# EAGLE board si4461 (EAGLE 4.16)
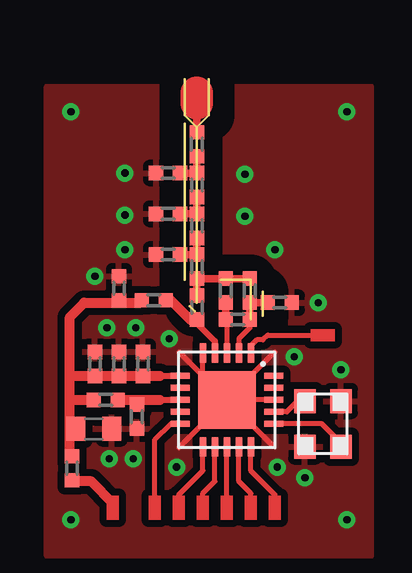
[diagram p0: board, top side]

Size 3.25 x 10 mm. Coordinates in mm from the lower left corner, seen from the top.
Outline: 0,10 0,8.5 0.5,8
Outline: 0.5,8 0.5,0.7
Outline: 0.4,0.35 0.2,0.55
Outline: 1,10 1,8.5 0.5,8
Outline: 1.5,1.65 2.75,1.65 2.75,0
Outline: 0,8.15 0,1.65
Outline: 3.25,1.15 3.25,0.15
Copper layers (1*16): Top 0.035mm / dielectric 1.5mm / Bottom 0.035mm
Design rules "default": minimum track width 10mil, minimum drill 24mil, track to track 8mil, track to pad 8mil, pad to pad 8mil, via to via 8mil, smd to smd 8mil, copper to edge 40mil, drill to drill 8mil, minimum pad ring 10mil, minimum via ring 8mil, stop-mask expansion 4mil, vias tented up to drill 0mil, thermal gap 10mil

## Footprints (pad centres in the part's own frame; a part is rotated, then mirrored left to right if it is on the bottom)
QFN20 = smd 0.8 x 0.26: 1 -1.95,1; 2 -1.95,0.5; 3 -1.95,0; 4 -1.95,-0.5; 5 -1.95,-1; 11 1.95,-1; 12 1.95,-0.5; 13 1.95,0; 14 1.95,0.5; 15 1.95,1 | smd 0.26 x 0.8: 6 -1,-1.95; 7 -0.5,-1.95; 8 0,-1.95; 9 0.5,-1.95; 10 1,-1.95; 16 1,1.95; 17 0.5,1.95; 18 0,1.95; 19 -0.5,1.95; 20 -1,1.95 | smd 2.4 x 2.4: EP 0,0
ABM10 = smd 1 x 0.9: P$1 -0.95,0.75; P$2 0.95,0.75; P$3 0.95,-0.75; P$4 -0.95,-0.75
C0402N = smd 0.6 x 0.6: 1 0.5,0; 2 -0.5,0
C0603N = smd 0.8 x 1: 1 -0.75,0; 2 0.75,0

## Placement (x,y rotation side)
E$1  [QFN20]  1.75,-3.35 270 top
E$2  [ABM10]  5.75,-4.35 90 top  (outside the outline)
E$3  [C0402N]  0.5,0.5 270 top
E$4  [C0402N]  -1.3,0.8 180 top
E$5  [C0402N]  -2.75,1.3 270 top
E$6  [C0402N]  -1.75,-1.85 270 top
E$7  [C0402N]  -2.75,-1.85 270 top
E$8  [C0402N]  -3.75,-1.85 270 top  (outside the outline)
E$9  [C0603N]  -3.8,-4.55 180 top  (outside the outline)
E$10  [C0402N]  -3.3,-3.35 0 top  (outside the outline)
E$11  [C0402N]  -2,-4.05 90 top  (outside the outline)
E$12  [C0402N]  0.5,2.2 270 top
E$13  [C0402N]  -0.7,2.7 0 top
E$14  [C0402N]  0.5,3.9 270 top
E$15  [C0402N]  -0.7,4.4 0 top
E$16  [C0402N]  0.5,5.6 270 top
E$17  [C0402N]  -0.7,6.1 0 top
E$18  [C0402N]  -4.7,-6.2 90 top  (outside the outline)
E$19  [C0402N]  3.95,0.7 0 top
E$20  [C0402N]  2.2,0 180 top
E$21  [C0402N]  1.7,1.2 270 top
E$22  [C0402N]  2.7,1.2 270 top
E$23  [C0402N]  0.5,7.3 90 top

## Library data of the parts
E$1 = texas
E$2 = crystal
E$3-E$23 = ref-packages

## Nets
GND: E$2.P$1 E$2.P$3 E$5.2 E$6.2 E$7.2 E$8.2 E$9.1 E$11.2 E$13.2 E$15.2 E$17.2 E$19.1
S$4: E$3.1 E$4.2
S$5: E$10.1
S$7: E$10.2
S$14: E$3.2
S$20: E$12.1

## Tracks (layer width: path | path; a pad name or v marks a point on that pad's centre or on a via)
GND  (via drill 0.3)
  Top 0.2: 1.75,-3.35 0.75,-2.35 | 0.75,-2.35 -0.25,-1.35 | 1.75,-3.35 3.75,-1.35 | 1.75,-3.35 3.6,-5.2 | -0.25,-5.35 1.75,-3.35 | 0.75,-2.35 0.75,-1.35
  other vias: -0.65,-0.8 -3.25,-0.35 -0.35,-6.15 3.85,-6.15 -3.75,1.8 -2.5,2.9 -2.5,4.35 -2.5,6.1 -3.15,-5.8 -2.15,-5.8 6.75,8.65 -4.75,8.65 -4.75,-8.35 6.75,-8.35 6.5,-2.1 -2.05,-0.35 2.5,6.05 2.5,4.3 3.75,2.9 5.55,0.7 4.55,-1.55 5,-6.6
  pour Top (isolate 0.305): -5.75,-9.85 -5.75,9.7 7.75,9.7 7.75,-9.85
S$1
  Top 0.2: 3.75,-3.85 4.25,-3.85 4.75,-3.35
S$2
  Top 0.2: 3.75,-4.35 5.7,-4.35 6.7,-5.35
S$3
  Top 0.2: 3.75,-3.35 2.25,-3.35
S$4
  Top 0.254: 1.25,-1.35 1.25,-0.9 0.5,-0.15 E$3.1
  Top 0.305: -0.6,0.8 E$4.2
  Top 0.406: E$3.1 0.2,0 -0.6,0.8
S$5
  Top 0.254: -1.05,-3.35 -0.25,-3.35
  Top 0.406: E$10.1 -1.05,-3.35
S$6
  Top 0.305: -0.35,2.7 0.5,2.7 0.5,3.5
S$7
  Top 0.254: -1.05,-2.35 -0.25,-2.35
  Top 0.406: -4.8,-2.35 -1.05,-2.35 | -4.8,-3.35 -4.8,-2.35 | -4.8,-2.35 -4.8,0.1 -4.2,0.7 -1.85,0.7 | -4.8,-3.35 E$10.2 | -4.8,-5.6 -4.8,-3.35
S$8
  Top 0.2: -0.25,-4.35 -0.6,-4.35 -1.25,-5 -1.25,-7.35
S$9
  Top 0.2: -0.25,-7.35 -0.25,-7.3 0.75,-6.3 0.75,-5.35
S$10
  Top 0.2: 0.75,-7.6 0.75,-7.25 1.25,-6.75 1.25,-5.35
S$11
  Top 0.2: 1.75,-7.35 1.75,-5.35
S$12
  Top 0.2: 2.75,-7.7 2.75,-7.25 2.25,-6.75 2.25,-5.35
S$13
  Top 0.2: 3.75,-7.75 3.75,-7.3 2.75,-6.3 2.75,-5.35
S$14
  Top 0.305: E$3.2 0.5,1.5
S$15
  Top 0.305: -0.3,4.4 0.5,4.4 0.5,5
S$16
  Top 0.305: 0.5,7.9 0.5,9
  Top 1.36: 0.5,9 0.5,9.45
S$17
  Top 0.406: -4.6,-6.75 -3.9,-6.75 -3,-7.65
S$19
  Top 0.305: 2.55,0.7 3.2,0.7
S$20
  Top 0.305: E$12.1 2.55,1.7
S$21
  Top 0.2: 1.75,-1.35 1.75,-0.15 1.55,-0.15 1.55,0.05 1.7,0.2
  Top 0.305: 1.7,0.2 1.7,0.7
S$22
  Top 0.2: 2.25,-1.35 2.25,-0.8 2.7,-0.35 2.7,0.1
  Top 0.305: 2.7,0.1 2.7,0.7
S$23
  Top 0.305: 0.5,6.75 0.5,6.1 -0.3,6.1
S$24
  Top 0.2: 2.75,-1.1 3,-0.85 3.25,-0.85 3.45,-0.65 5.6,-0.65
(copper drawn outside any net)
  shapes: Top area x8